# Altium PCB HeaderBoardPCB.PcbDoc
Units mil, origin at the board's own origin, x right, y up, seen from the top; angles counter-clockwise.
Board outline 6000 x 4000 mil, 2 copper layers (Top Layer, Bottom Layer); 23 components, 43 nets, 115 pads, 0 vias.
Unrouted connection lines stored in the file: 3.
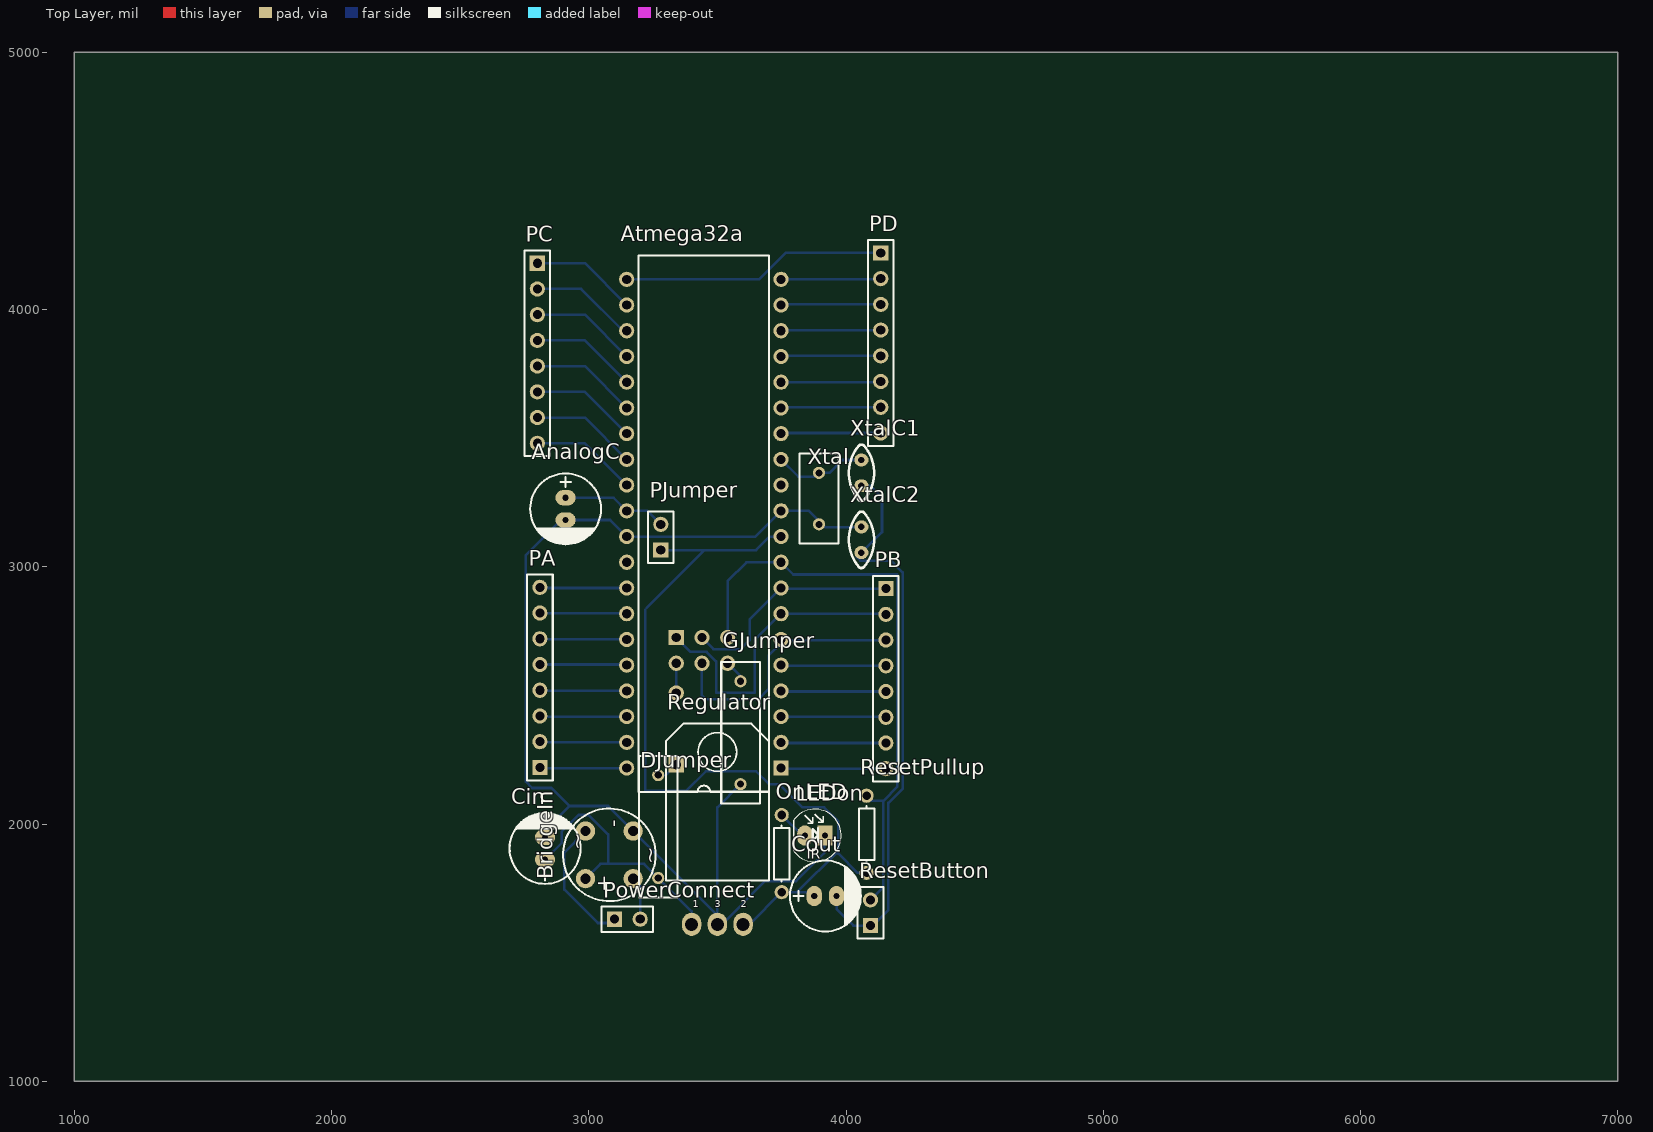
[diagram p0: Top Layer view]
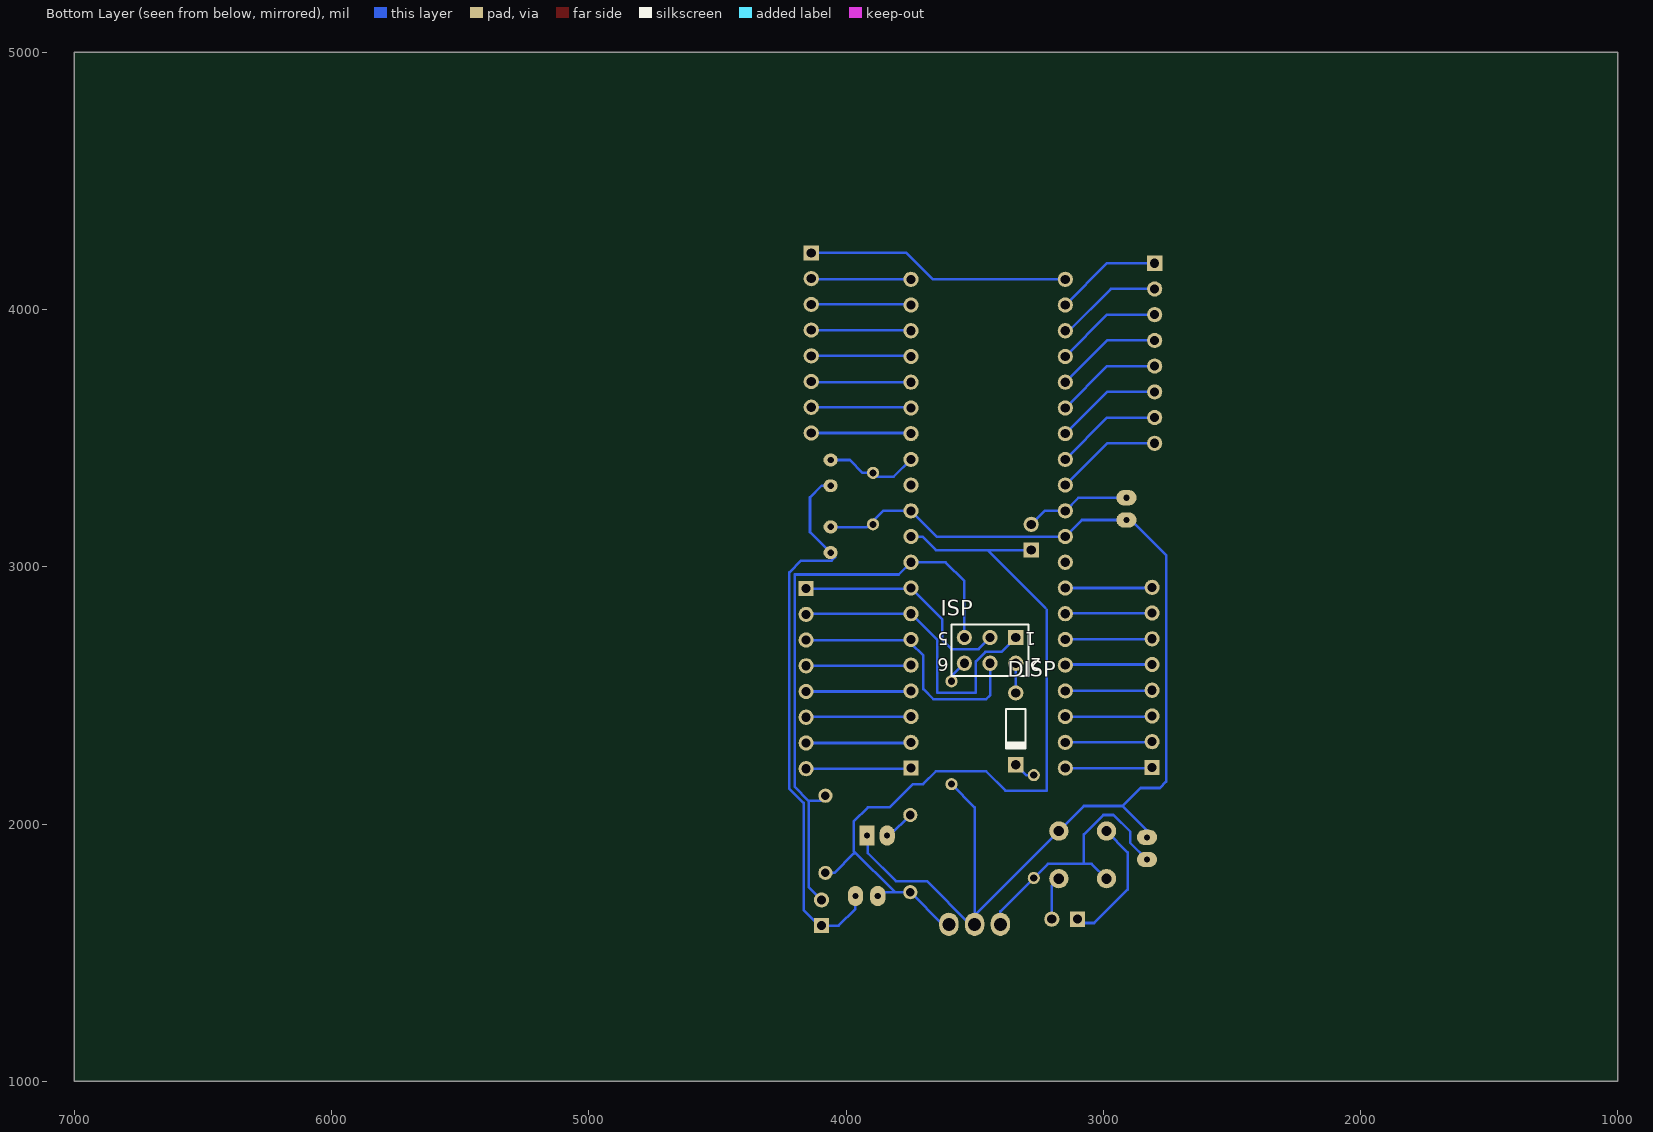
[diagram p1: Bottom Layer view, seen from below]

## Layer stack, top to bottom
Top Layer: signal copper 1.4
Dielectric: dielectric 12.6, FR-4, Dk 4.8
Bottom Layer: signal copper 1.4

## Board outline
1000,1000 7000,1000 7000,5000 1000,5000

## Design rules (kind name [scope] priority, off if disabled: settings)
Clearance [All] p1: gap=10
PolygonConnect [All] p1: connectstyle=Relief reliefconductorwidth=10 reliefentries=4 polygonreliefangle="90 Angle"
RoomDefinition HeaderBoard [InComponentClass('HeaderBoard')] p1: confinementstyle=ConfineIn formatcopy=TRUE lockcomponents=FALSE outline 6985,1070 12475,1070 12475,3280 6985,3280
RoutingVias [All] p1: holewidth=28 width=50 viastyle="Through Hole" minholewidth=28 minwidth=50 maxholewidth=28 maxwidth=50
SilkscreenOverComponentPads [All] p1: minsilkscreentomaskgap=10
SolderMaskExpansion [All] p1: expansion=4
Width [All] p1: maxlimit=10 minlimit=10 preferedwidth=10
27 further rules are at their usual default settings.

## Components (designator, comment, footprint, x,y, rotation, side; value= is the part's Value field where it differs from the comment)
AnalogC "Cap Pol1" "cap 02" 2910,3225 r90 top
Atmega32a "ATmega32-16PI" 40P6 3447.52,3167.48 r90 top
BridgeIn "Bridge2" Bridge 3080,1880 r90 top
Cin "Cap Pol1" "cap 02" 2830,1905 r270 top
Cout "Cap Pol1" "cap 02" 3920,1720 r180 top
DISP "Diode 1N914" DO-35 3340,2370 r270 bottom
DJumper "Jumper" RAD-0.4 3270,1990 r270 top
GJumper "Jumper" RAD-0.4 3590,2355 r270 top
ISP "Header 3X2" HDR2X3 3340,2725 r0 bottom
LEDon "IR Reciever" "LED-5mm-IR Reciver" 3840,1955 r0 top
OnLED "Res1" AXIAL-0.3 3750,1885 r270 top
PA "Header 8" HDR1X8 2810,2220 r90 top
PB "Header 8" HDR1X8 4155,2915 r270 top
PC "Header 8" HDR1X8 2800,4180 r270 top
PD "Header 8" HDR1X8 4135,4220 r270 top
PJumper "Header 2" HDR1X2 3280,3065 r90 top
PowerConnect "Header 2" HDR1X2 3100,1630 r0 top
Regulator "MC7805T" "78XXCV - Right" 3500,1610 r0 top
ResetButton "Header 2" HDR1X2 4095,1605 r90 top
ResetPullup "Res1" AXIAL-0.3 4080,1960 r90 top
Xtal "XTAL" RAD-0.2 3895,3265 r270 top
XtalC1 "Cap" "Cap - 100nF" 4060,3365 r90 top
XtalC2 "Cap" "Cap - 100nF" 4060,3105 r270 top

## Footprints (in the part's own frame and the unit in brackets; to place one, negate y for a bottom-side part, rotate by r counter-clockwise, add the part's x,y. Pads: shape width x height; smd on the part's side, far side on the other; paste and mask are expansions set on the pad)
40P6 [mm] "DIP; 40 Leads; Row Spacing 15.24 mm; Pitch 2.54 mm"
  rect 1.5x1.5 hole 0.9: 1(-24.13,-7.62)
  round 1.5 hole 0.9: 2(-21.59,-7.62) 3(-19.05,-7.62) 4(-16.51,-7.62) 5(-13.97,-7.62) 6(-11.43,-7.62) 7(-8.89,-7.62) 8(-6.35,-7.62) 9(-3.81,-7.62) 10(-1.27,-7.62) 11(1.27,-7.62) 12(3.81,-7.62) 13(6.35,-7.62) 14(8.89,-7.62) 15(11.43,-7.62) 16(13.97,-7.62) 17(16.51,-7.62) 18(19.05,-7.62) 19(21.59,-7.62) 20(24.13,-7.62) 21(24.13,7.62) 22(21.59,7.62) 23(19.05,7.62) 24(16.51,7.62) 25(13.97,7.62) 26(11.43,7.62) 27(8.89,7.62) 28(6.35,7.62) 29(3.81,7.62) 30(1.27,7.62) 31(-1.27,7.62) 32(-3.81,7.62) 33(-6.35,7.62) 34(-8.89,7.62) 35(-11.43,7.62) 36(-13.97,7.62) 37(-16.51,7.62) 38(-19.05,7.62) 39(-21.59,7.62) 40(-24.13,7.62)
  silkscreen extent -26.5,-6.45 26.5,6.45
"78XXCV - Right" [mil] "Right Angle"
  oval 75x90 hole 50: 1(-100,0) 2(0,0) 3(100,0)
  silkscreen extent -201,170 200,780, body extent -198,-8 202,776, height 175
AXIAL-0.3 [mm] "Axial Device, Thru-Hole; 2 Leads; 0.3 in Pin Spacing"
  round 1.4 hole 0.85: 1(-3.81,0) 2(3.81,0)
  silkscreen extent -2.77,-0.76 2.77,0.76
Bridge [mm]
  round 1.905 hole 1.016: 1(-2.35,2.35) 2(-2.35,-2.35) 3(2.35,-2.35) 4(2.35,2.35)
  silkscreen extent -4.57,-4.57 4.57,4.57, body extent -3.92,-4.06 4.18,4.04, height 5.21
"cap 02" [mm]
  oval 1.5x2 hole 0.6: 1(1.1,0) 2(-1.1,0)
  silkscreen extent -3.5,-3.5 3.5,3.5
"Cap - 100nF" [mil]
  oval 50x55 hole 25: 1(-50,0) 2(50,0)
  silkscreen extent -110,-49 110,49, body extent -115,-34 115,33, height 272
DO-35 [mm] "Diode, Axial; Body 3.8 x 1.9 mm (LxDia. max), Lead Dia. 0.53 mm (max)"
  round 1.5 hole 0.9: 1(-3.55,0)
  rect 1.5x1.5 hole 0.9: 2(3.55,0)
  silkscreen extent -1.95,-0.95 2.05,0.95
HDR1X2 [mm] "Connector; Header; 2 Position"
  rect 1.5x1.5 hole 0.9: 1(0,0)
  round 1.5 hole 0.9: 2(2.54,0)
  silkscreen extent -1.27,-1.27 3.81,1.27
HDR1X8 [mm] "Connector; Header; 8 Position"
  rect 1.5x1.5 hole 0.9: 1(0,0)
  round 1.5 hole 0.9: 2(2.54,0) 3(5.08,0) 4(7.62,0) 5(10.16,0) 6(12.7,0) 7(15.24,0) 8(17.78,0)
  silkscreen extent -1.27,-1.27 19.05,1.27
HDR2X3 [mm] "Connector; Header; 3x2 Position"
  rect 1.5x1.5 hole 0.9: 1(0,0)
  round 1.5 hole 0.9: 2(0,2.54) 3(2.54,0) 4(2.54,2.54) 5(5.08,0) 6(5.08,2.54)
  silkscreen extent -1.27,-1.27 6.35,3.81
"LED-5mm-IR Reciver" [mm]
  oval 1.5x2 hole 0.6: 1(0,0)
  rect 1.5x2 hole 0.6: 2(2,0)
  silkscreen extent -1.1,-2.6 3.6,2.6
RAD-0.2 [mm] "Radial Cap, Thru-Hole; 2 Leads; 0.2 in Pin Spacing"
  round 1.2 hole 0.7: 1(-2.54,0) 2(2.54,0)
  silkscreen extent -4.44,-1.91 4.44,1.91
RAD-0.4 [mm] "Radial Cap, Thru-Hole; 2 Leads; 0.4 in Pin Spacing"
  round 1.2 hole 0.7: 1(-5.08,0) 2(5.08,0)
  silkscreen extent -6.98,-1.91 6.98,1.91

## Part data
AnalogC Cin Cout: "Polarized Capacitor (Radial)"
Atmega32a: "8-Bit AVR Microcontroller with 32K Bytes of In-System Programmable Flash Memory"
BridgeIn: "Diode Bridge"
DISP: "High Conductance Fast Diode"
DJumper GJumper: "Jumper Wire"
ISP: "Header, 3-Pin, Dual row"
LEDon: library part "LED IR Reciever", "Infra Red Reciever Photo Diode"
OnLED ResetPullup: "Resistor"
PA PB PC PD: "Header, 8-Pin"
PJumper PowerConnect ResetButton: "Header, 2-Pin"
Xtal: "Crystal Oscillator"
XtalC1 XtalC2: "Capacitor"

## Nets (pads, with @x,y where several pads share a name; then routed paths per layer and width w, separated by ;. In a path a pad name is that pad's centre, name@x,y a point inside that pad or via, vN(x,y) a via of type N, cw(c..) or ccw(c..) an arc to the next point about the centre after c; other vN are vias at no path point)
GND: AnalogC.2 Atmega32a.11 Atmega32a.12 Atmega32a.31 BridgeIn.3 Cin.2 Cout.2 GJumper.2 LEDon.2 Regulator.2 ResetButton.1 Xtal.2 XtalC1.1 XtalC2.1 XtalC2.2 | length 6845.9
  Bottom Layer w10: Cin.2 2830,1975 2925,2070 ; GJumper.2 3500,2065 Regulator.2@3500,1645.04 ; LEDon.2@3915,1950 3915,1886.26 3806.3,1777.56 3685.81,1777.56 3518.25,1610 Regulator.2 Regulator.2@3500,1645.04 ; Cout.2 3963.31,1670 4028.31,1605 ResetButton.1 4105,1605 4165,1665 4165,2081.72 4220,2136.72 4220,2978.28 4174.14,3024.14 4055.86,3024.14 4042.5,3037.5 XtalC2.2 4140,3135 4140,3270 4095,3315 XtalC1.1 ; XtalC2.1@4060,3153.15 3920,3153.15 3855.67,3217.48 Atmega32a.11 3647.52,3117.48 Atmega32a.31 3083.31,3181.69 AnalogC.2 2891.69,3181.69 2755.47,3045.47 2755.47,2164.53 2780,2140 2855,2140 2925,2070 ; 2925,2070 3075.04,2070 BridgeIn.3 Regulator.2@3500,1645.04
MISO: Atmega32a.7 ISP.1 PB.2 | length 1223.2
  Bottom Layer w10: ISP.1 3395.47,2669.53 3458.44,2669.53 3495.47,2632.5 3495.47,2510 3645,2510 3645,2714.96 Atmega32a.7 PB.2@4155,2817.48
MOSI: Atmega32a.6 ISP.4 PB.3 | length 1024.9
  Bottom Layer w10: ISP.4 3440,2500 3455,2485 3660,2485 3699.39,2524.39 3699.39,2654.39 3747.52,2702.52 Atmega32a.6 ; Atmega32a.6@3750,2715 PB.3
NetAtmega32a_1: Atmega32a.1 PB.8 | length 405
  Bottom Layer w10: Atmega32a.1@3750,2215 PB.8
NetAtmega32a_2: Atmega32a.2 PB.7 | length 405
  Bottom Layer w10: Atmega32a.2@3750,2315 PB.7
NetAtmega32a_3: Atmega32a.3 PB.6 | length 407.5
  Bottom Layer w10: Atmega32a.3 PB.6@4155,2417.48
NetAtmega32a_4: Atmega32a.4 PB.5 | length 405
  Bottom Layer w10: Atmega32a.4@3750,2515 PB.5
NetAtmega32a_5: Atmega32a.5 PB.4 | length 405
  Bottom Layer w10: Atmega32a.5@3750,2615 PB.4
NetAtmega32a_13: Atmega32a.13 Xtal.1 XtalC1.2 | length 367.4
  Bottom Layer w10: Atmega32a.13 3815,3350 3880,3350 Xtal.1 3935,3365 3985,3415 XtalC1.2
NetAtmega32a_14: Atmega32a.14 PD.8 | length 385
  Bottom Layer w10: Atmega32a.14@3750.04,3520 PD.8
NetAtmega32a_15: Atmega32a.15 PD.7 | length 385
  Bottom Layer w10: Atmega32a.15@3750.04,3620 PD.7
NetAtmega32a_16: Atmega32a.16 PD.6 | length 391
  Bottom Layer w10: Atmega32a.16 4132.48,3717.48 PD.6 PD.6@4132.48,3720
NetAtmega32a_17: Atmega32a.17 PD.5 | length 385
  Bottom Layer w10: Atmega32a.17@3750.04,3820 PD.5
NetAtmega32a_18: Atmega32a.18 PD.4 | length 385
  Bottom Layer w10: Atmega32a.18@3750.04,3920 PD.4
NetAtmega32a_19: Atmega32a.19 PD.3 | length 385
  Bottom Layer w10: Atmega32a.19@3750.04,4020 PD.3
NetAtmega32a_20: Atmega32a.20 PD.2 | length 387.5
  Bottom Layer w10: Atmega32a.20 PD.2@4135,4117.48
NetAtmega32a_21: Atmega32a.21 PD.1 | length 1029.9
  Bottom Layer w10: Atmega32a.21 3662.48,4117.48 3765,4220 PD.1
NetAtmega32a_22: Atmega32a.22 PC.1 | length 414.8
  Bottom Layer w10: PC.1 2985,4180 Atmega32a.22
NetAtmega32a_23: Atmega32a.23 PC.2 | length 414.8
  Bottom Layer w10: PC.2 2970,4080 3132.52,3917.48 Atmega32a.23
NetAtmega32a_24: Atmega32a.24 PC.3 | length 414.8
  Bottom Layer w10: PC.3 2985,3980 Atmega32a.24
NetAtmega32a_25: Atmega32a.25 PC.4 | length 414.8
  Bottom Layer w10: PC.4 2985,3880 Atmega32a.25
NetAtmega32a_26: Atmega32a.26 PC.5 | length 414.8
  Bottom Layer w10: PC.5 2985,3780 Atmega32a.26
NetAtmega32a_27: Atmega32a.27 PC.6 | length 414.8
  Bottom Layer w10: PC.6 2985,3680 Atmega32a.27
NetAtmega32a_28: Atmega32a.28 PC.7 | length 414.8
  Bottom Layer w10: PC.7 2985,3580 Atmega32a.28
NetAtmega32a_29: Atmega32a.29 PC.8 | length 414.8
  Bottom Layer w10: PC.8 2985,3480 Atmega32a.29
NetAtmega32a_33: Atmega32a.33 PA.8 | length 337.5
  Bottom Layer w10: PA.8@2810,2917.48 Atmega32a.33
NetAtmega32a_34: Atmega32a.34 PA.7 | length 335
  Bottom Layer w10: PA.7 Atmega32a.34@3145,2820
NetAtmega32a_35: Atmega32a.35 PA.6 | length 337.5
  Bottom Layer w10: PA.6@2810,2717.48 Atmega32a.35
NetAtmega32a_36: Atmega32a.36 PA.5 | length 335
  Bottom Layer w10: PA.5 Atmega32a.36@3145,2620
NetAtmega32a_37: Atmega32a.37 PA.4 | length 337.5
  Bottom Layer w10: PA.4@2810,2517.48 Atmega32a.37
NetAtmega32a_38: Atmega32a.38 PA.3 | length 337.5
  Bottom Layer w10: PA.3@2810,2417.48 Atmega32a.38
NetAtmega32a_39: Atmega32a.39 PA.2 | length 337.5
  Bottom Layer w10: PA.2@2810,2317.48 Atmega32a.39
NetAtmega32a_40: Atmega32a.40 PA.1 | length 332.5
  Bottom Layer w10: PA.1@2815,2217.48 Atmega32a.40
NetBridgeIn_2: BridgeIn.2 PowerConnect.2 | length 168.9
  Bottom Layer w10: BridgeIn.2 3200,1760 PowerConnect.2
NetBridgeIn_4: BridgeIn.4 PowerConnect.1 | length 510.5
  Bottom Layer w10: BridgeIn.4 2905,1890.04 2905,1745 3035,1615 PowerConnect.1@3100,1615
NetDISP_1: DISP.1 ISP.2 | length 115.2
  Bottom Layer w10: DISP.1 ISP.2
NetDISP_2: DISP.2 DJumper.1 | length 86.7
  Bottom Layer w10: DJumper.1 3299.76,2190 DISP.2
NetGJumper_1: GJumper.1 ISP.6 | length 90.7
  Bottom Layer w10: ISP.6 3590,2575 GJumper.1
NetLEDon_1: LEDon.1 OnLED.1 | length 128.1
  Bottom Layer w10: OnLED.1@3755,2035 OnLED.1 3830,1955 LEDon.1
RESET: Atmega32a.9 ISP.5 ResetButton.2 ResetPullup.2 | length 2311.5
  Bottom Layer w10: ISP.5 3540,2945 3612.48,3017.48 Atmega32a.9 3795,2970 4200,2970 4200,2145 4145,2090 ; ResetPullup.2 4100,2090 4145,2090 ; ResetButton.2 4145,1755 4145,2090
SCK: Atmega32a.8 ISP.3 PB.1 | length 876.4
  Bottom Layer w10: ISP.3 3485,2680 3590,2680 3625,2715 3625,2794.96 Atmega32a.8 ; Atmega32a.8@3750,2915 PB.1
V5.5: AnalogC.1 Atmega32a.10 Atmega32a.30 Cout.1 OnLED.2 PJumper.1 PJumper.2 Regulator.3 ResetPullup.1 | length 3638.1
  Bottom Layer w10: AnalogC.1 3096.69,3268.31 Atmega32a.30 3227.52,3217.48 PJumper.2 ; 3220,2833.62 3220,2130 3380,2130 3455,2205 3650,2205 3700,2155 3740,2155 3830,2065 3915,2065 3970,2010 3970,1895 3810,1735 ; 3225,2840 3450,3065 ; PJumper.1 3450,3065 ; Regulator.3@3625,1585 Regulator.3 3625,1610 OnLED.2 3810,1735 ; Atmega32a.10 3702.48,3117.48 3650,3065 3450,3065 ; Cout.1 3861.69,1735 3810,1735 ; 3970,1885 4045,1810 ResetPullup.1
VIN: BridgeIn.1 Cin.1 DJumper.2 Regulator.1 | length 1050.8
  Bottom Layer w10: Cin.1 2895,1926.69 2895,1970 2960,2035 2999.25,2035 3075,1959.25 3075,1845 ; BridgeIn.1 3045,1845 3075,1845 ; Regulator.1 3400,1660 DJumper.2 3215,1845 3075,1845
pads on no net: Atmega32a.32

## Text inside footprints (layer, text, board x,y; h text height)
BridgeIn: Top Overlay "-" at 3121.5,1987.2 h59.06 r90; Top Overlay "+" at 3086,1734.4 h59.06 r90; Top Overlay "~" at 3265.6,1842.9 h59.06 r90; Top Overlay "~" at 2982,1897 h59.06 r90
ISP: Bottom Overlay "1" at 3260,2745 h50 r180; Bottom Overlay "2" at 3240,2645 h50 r180; Bottom Overlay "5" at 3600,2745 h50 r180; Bottom Overlay "6" at 3600,2645 h50 r180
LEDon: Top Overlay "IR" at 3847,1865 h39.37
Regulator: Top Overlay "1" at 3405,1676.93 h27.56; Top Overlay "2" at 3591,1676.93 h27.56; Top Overlay "3" at 3490,1676.93 h27.56